# Altium PCB Sampler_DIOT.PCBDOC (part 9 of 9)
Units mm, origin at the board's own origin, x right, y up, seen from the top; angles counter-clockwise.
Board outline 222.17 x 100 mm, 4 copper layers (Top, GP1(GND), L3, Bot), stack 1.672 mm thick; 664 components, 411 nets, 2128 pads, 911 vias.
Unrouted connection lines stored in the file: 4.
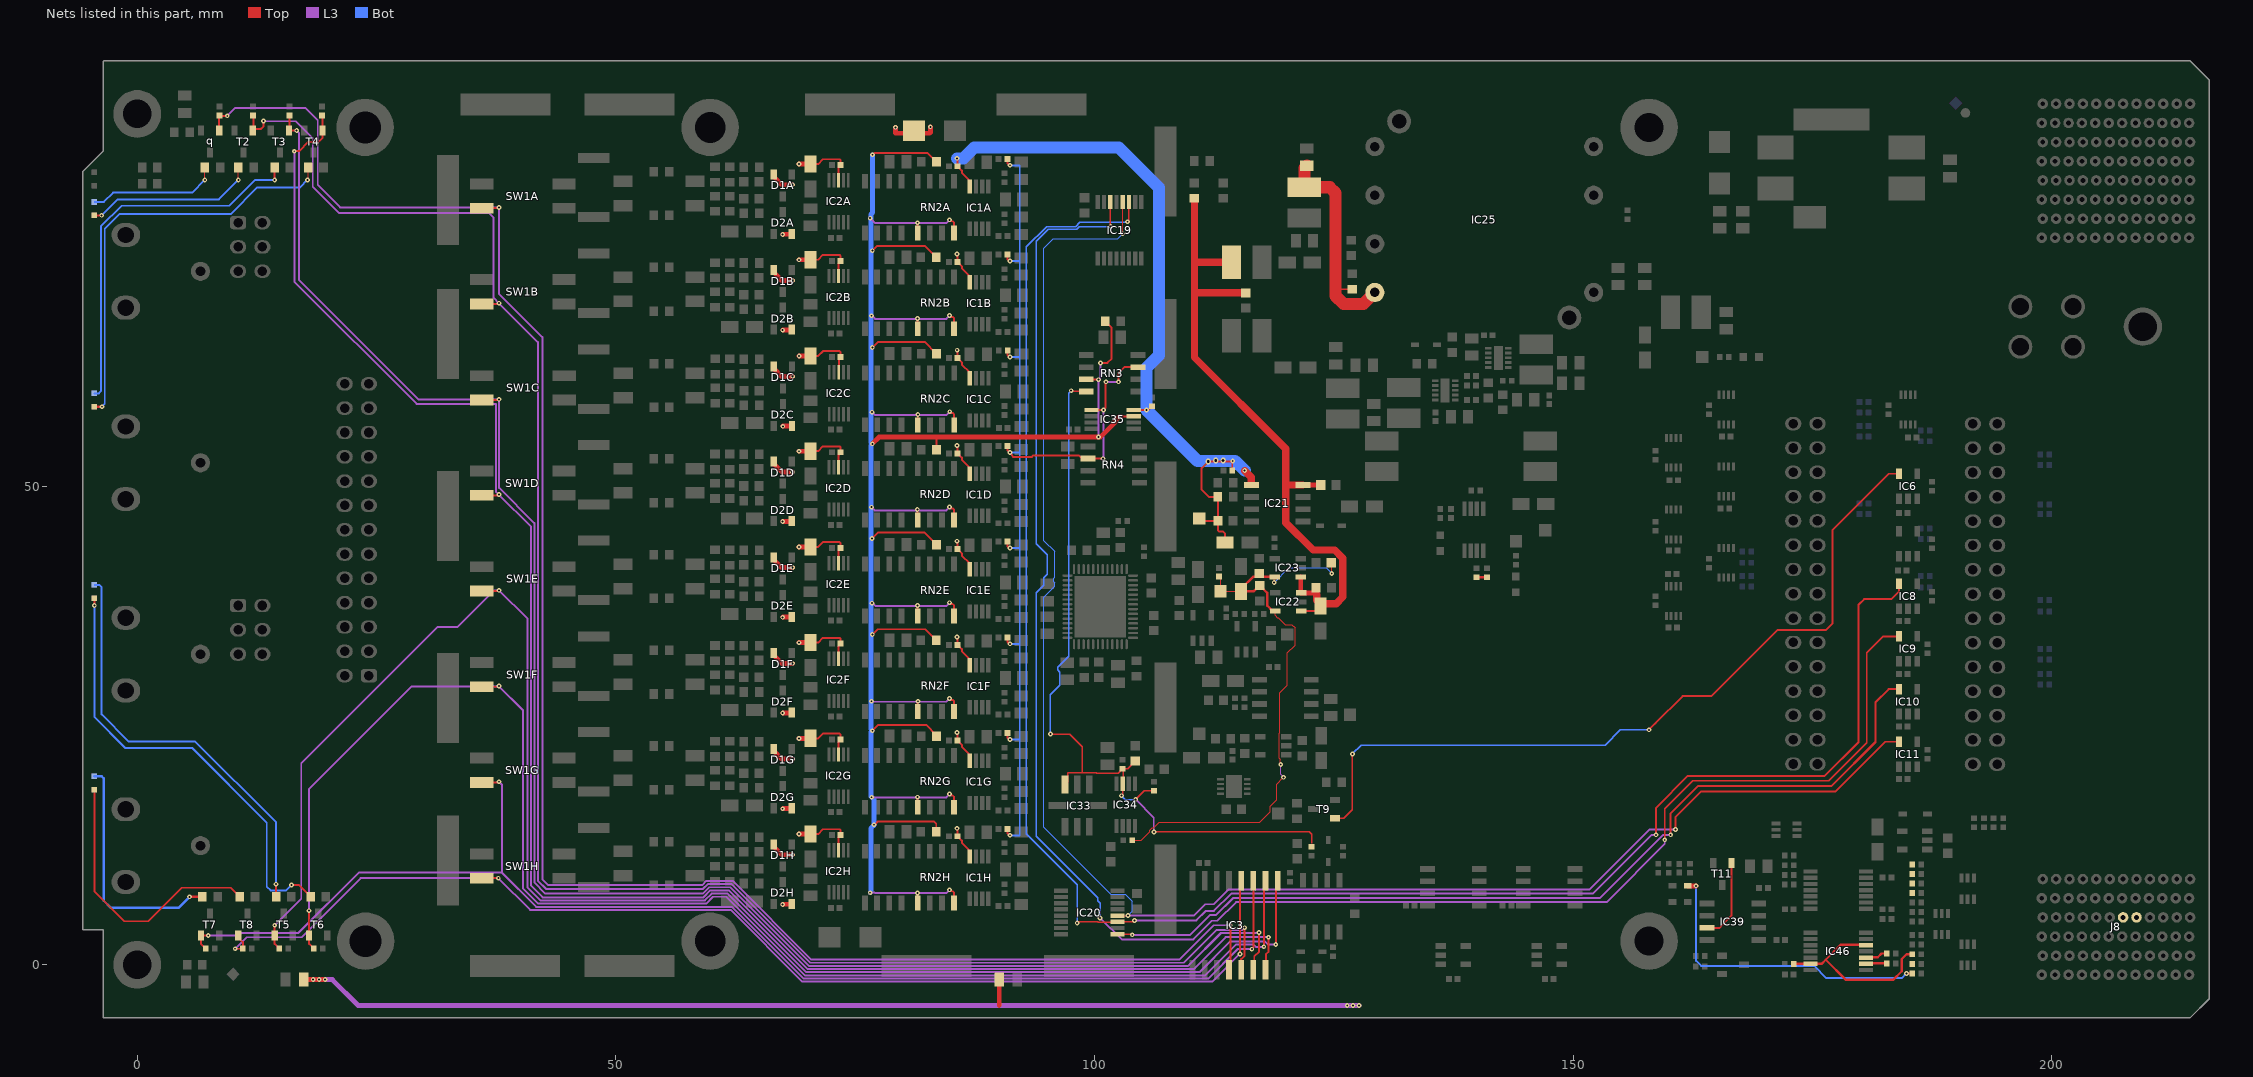
[diagram p9: the nets of this part, all layers, seen from the top]

## Via types
v1: diameter 0.5, hole 0.2, Top to Bot, tented both sides, 878 vias
v2: diameter 1, hole 0.6, Top to Bot, tented both sides, 18 vias
v3: diameter 0.6, hole 0.3, Top to Bot, tented both sides, 13 vias
v4: diameter 1.27, hole 0.711, Top to Bot, tented both sides, 2 vias

## Nets (pads, with @x,y where several pads share a name; then routed paths per layer and width w, separated by ;. In a path a pad name is that pad's centre, name@x,y a point inside that pad or via, vN(x,y) a via of type N, cw(c..) or ccw(c..) an arc to the next point about the centre after c; other vN are vias at no path point) (continued)
P12V0A: C8A.1 C8B.1 C8C.1 C8D.1 C8E.1 C8F.1 C8G.1 C8H.1 C9A.2 C9B.2 C9C.2 C9D.2 C9E.2 C9F.2 C9G.2 C9H.2 C13A.2 C13B.2 C13C.2 C13D.2 C13E.2 C13F.2 C13G.2 C13H.2 C38.1 C39.2 C40.2 C104.2 D1A.2 D1B.2 D1C.2 D1D.2 D1E.2 D1F.2 D1G.2 D1H.2 D2A.2 D2B.2 D2C.2 D2D.2 D2E.2 D2F.2 D2G.2 D2H.2 D5.1 IC1A.8 IC1B.8 IC1C.8 IC1D.8 IC1E.8 IC1F.8 IC1G.8 IC1H.8 IC2A.8 IC2B.8 IC2C.8 IC2D.8 IC2E.8 IC2F.8 IC2G.8 IC2H.8 IC21.1 IC35.8 R51.2 TP7.1 | length 193.7
  Top w0.203: C8H.1@70.329,13.658 71.129,13.658 71.632,14.161 73.364,14.161 73.475,14.05 C9H.2@73.475,13.55 73.275,13.35 IC2H.8@73.275,11.967 ; C8G.1@70.329,23.658 71.129,23.658 71.632,24.161 73.364,24.161 73.475,24.05 C9G.2@73.475,23.55 ; C8F.1@70.329,33.658 71.129,33.658 71.632,34.161 73.364,34.161 73.475,34.05 C9F.2@73.475,33.55 ; C8E.1@70.329,43.658 71.129,43.658 71.632,44.161 73.364,44.161 73.475,44.05 C9E.2@73.475,43.55 ; C8D.1@70.329,53.658 71.129,53.658 71.632,54.161 73.364,54.161 73.475,54.05 C9D.2@73.475,53.55 ; C8B.1@70.329,73.658 71.129,73.658 71.632,74.161 73.364,74.161 73.475,74.05 C9B.2@73.475,73.55 ; C8A.1@70.329,83.658 71.129,83.658 71.632,84.161 73.364,84.161 73.475,84.05 C9A.2@73.475,83.55 ; C8C.1@70.341,63.614 71.141,63.614 71.639,64.111 ; 71.632,64.111 71.639,64.111 ; 71.645,64.117 71.639,64.111 ; IC2G.8@73.275,21.967 73.275,23.258 C9G.2@73.465,23.448 ; IC2F.8@73.275,31.967 73.275,33.258 C9F.2@73.465,33.448 ; IC2E.8@73.275,41.967 73.275,43.258 C9E.2@73.465,43.448 ; IC2D.8@73.275,51.967 73.275,53.258 C9D.2@73.465,53.448 ; IC2B.8@73.275,71.967 73.275,73.258 C9B.2@73.465,73.448 ; IC2A.8@73.275,81.967 73.275,83.258 C9A.2@73.465,83.448 ; IC2C.8@73.288,61.923 73.288,63.214 C9C.2@73.478,63.404 ; C9C.2@73.475,63.5 73.475,64 73.364,64.111 71.639,64.111 ; v1(85.644,14.255) 85.694,14.205 C13H.2@85.694,13.43 86.144,12.98 86.144,12.755 86.969,11.93 IC1H.8@86.969,11.309 ; v1(85.644,24.255) 85.694,24.205 C13G.2@85.694,23.43 86.144,22.98 86.144,22.755 86.969,21.93 IC1G.8@86.969,21.309 ; v1(85.644,34.255) 85.694,34.205 C13F.2@85.694,33.43 86.144,32.98 86.144,32.755 86.969,31.93 IC1F.8@86.969,31.309 ; v1(85.644,44.255) 85.694,44.205 C13E.2@85.694,43.43 86.144,42.98 86.144,42.755 86.969,41.93 IC1E.8@86.969,41.309 ; v1(85.644,54.255) 85.694,54.205 C13D.2@85.694,53.43 86.144,52.98 86.144,52.755 86.969,51.93 IC1D.8@86.969,51.309 ; v1(85.644,74.255) 85.694,74.205 C13B.2@85.694,73.43 86.144,72.98 86.144,72.755 86.969,71.93 IC1B.8@86.969,71.309 ; v1(85.644,84.255) 85.694,84.205 C13A.2@85.694,83.43 86.144,82.98 86.144,82.755 86.969,81.93 IC1A.8@86.969,81.309 ; v1(85.657,64.211) 85.707,64.161 C13C.2@85.707,63.386 86.157,62.936 86.157,62.711 86.982,61.886 IC1C.8@86.982,61.265 ; IC35.8@104.094,57.955 v1(105.444,57.955) 105.619,57.955 C104.2@106.019,58.355 ; TP7.1@110.944,46.63 111.194,46.38 C40.2@112.894,46.38 ; C38.1@113.644,44.13 113.644,45.03 113.394,45.28 112.994,45.28 112.894,45.38 C40.2@112.894,46.38 ; C39.2@114.394,51.63 114.394,52.58 v3(111.894,52.58) 111.194,51.88 111.194,49.63 111.944,48.88 R51.2@112.894,48.88 C40.2@112.894,46.38
  Top w0.508: D1H.2@66.483,12.568 66.483,12.338 67.327,11.494 v1(68.457,11.494) ; D1G.2@66.483,22.568 66.483,22.338 67.327,21.494 v1(68.457,21.494) ; D1F.2@66.483,32.568 66.483,32.338 67.327,31.494 v1(68.457,31.494) ; D1E.2@66.483,42.568 66.483,42.338 67.327,41.494 v1(68.457,41.494) ; D1D.2@66.483,52.568 66.483,52.338 67.327,51.494 v1(68.457,51.494) ; D1B.2@66.483,72.568 66.483,72.338 67.327,71.494 v1(68.457,71.494) ; D1A.2@66.483,82.568 66.483,82.338 67.327,81.494 v1(68.457,81.494) ; D1C.2@66.496,62.524 66.496,62.294 67.339,61.45 v1(68.47,61.45) ; v1(67.428,6.304) 67.446,6.322 D2H.2@68.338,6.322 ; v1(67.428,16.304) 67.446,16.322 D2G.2@68.338,16.322 ; v1(67.428,26.304) 67.446,26.322 D2F.2@68.338,26.322 ; v1(67.428,36.304) 67.446,36.322 D2E.2@68.338,36.322 ; v1(67.428,46.304) 67.446,46.322 D2D.2@68.338,46.322 ; v1(67.428,66.304) 67.446,66.322 D2B.2@68.338,66.322 ; v1(67.428,76.304) 67.446,76.322 D2A.2@68.338,76.322 ; v1(67.44,56.26) 67.459,56.278 D2C.2@68.35,56.278 ; v1(69.135,13.653) 69.14,13.658 C8H.1@70.329,13.658 ; v1(69.135,23.653) 69.14,23.658 C8G.1@70.329,23.658 ; v1(69.135,33.653) 69.14,33.658 C8F.1@70.329,33.658 ; v1(69.135,43.653) 69.14,43.658 C8E.1@70.329,43.658 ; v1(69.135,53.653) 69.14,53.658 C8D.1@70.329,53.658 ; v1(69.135,73.653) 69.14,73.658 C8B.1@70.329,73.658 ; v1(69.135,83.653) 69.14,83.658 C8A.1@70.329,83.658 ; v1(69.148,63.609) 69.152,63.614 C8C.1@70.341,63.614 ; v1(79.22,87.498) 79.22,86.88 82.776,86.88 82.852,86.956 v1(82.852,87.549)
  Top w0.762: v1(115.694,51.63) 116.393,50.931 IC21.1@116.393,50.25
  Bot w1.27: v1(85.644,84.255) 86.319,84.255 87.444,85.38 102.544,85.38 106.725,81.199 106.725,63.661 105.444,62.38 v1(105.444,57.955) 110.757,52.642 112.669,52.642 114.432,52.642 v1(114.444,52.63) 114.694,52.63 v1(115.694,51.63)
  other v3: 112.669,52.68 113.444,52.68
P13V0: C37.2 C43.2 C47.1 C51.2 IC21.8 IC22.1 IC22.3 IC23.1 L3.2 R41.2 | length 72.3
  Top w0.254: IC22.1@121.598,36.96 123.1,36.96 123.598,37.458 C47.1@123.598,37.476
  Top w0.508: IC23.1@121.548,40.514 121.548,38.881 121.569,38.86 IC22.3@121.59,38.86 ; IC22.3@121.598,38.86 123.051,38.86 ; IC21.8@121.798,50.13 C37.2@123.644,50.13 ; C43.2@123.144,39.371 123.051,39.279 123.051,38.86 ; 123.223,38.688 123.051,38.86
  Top w0.762: 110.444,71.171 R41.2@110.444,80.08 ; 110.448,71.171 110.448,70.2 110.448,68.884 110.448,63.452 119.998,53.902 119.998,46.177 122.849,43.326 125.092,43.326 125.944,42.474 125.944,38.421 125.248,37.726 123.84,37.726 C47.1@123.594,37.48 123.594,37.705 123.223,38.076 123.223,38.688 ; 110.494,70.2 C51.2@115.819,70.2 ; 110.558,73.4 L3.2@114.3,73.4 ; 119.998,50.13 IC21.8@121.789,50.13
P13V0S: C48.2 IC25.7 L2.1 R56.2 | length 23.3
  Top w0.203: 125.194,70.58 R56.2@126.944,70.58
  Top w1.27: C48.2@122.194,83.48 121.944,83.23 L2.1@121.944,81.23 124.594,81.23 125.194,80.63 125.194,70.58 125.194,69.88 126.022,69.052 128.101,69.052 IC25.7@129.294,70.245
PE_CLK_N: J8.F4
PE_CLK_P: J8.E4
PGIA-CS: IC11.5 IC19.12 IC20.12 | length 177.8
  Top w0.127: IC20.12@102.399,5.137 v1(103.501,5.137) ; v1(102.944,76.38) 102.954,76.39 IC19.12@102.954,79.697
  Top w0.203: v1(160.7,14.125) 160.7,15.425 163.4,18.125 177.426,18.125 182.601,23.3 IC11.5@184.05,23.3
  L3 w0.203: v1(103.501,5.137) 110.384,5.137 111.573,6.325 112.475,6.325 114.03,7.88 151.73,7.88 157.975,14.125 v1(160.7,14.125)
  Bot w0.127: v1(102.944,76.38) 102.444,75.88 95.694,75.88 94.694,74.88 94.694,57.692 94.697,57.689 94.697,56.671 94.694,56.668 94.694,44.319 95.829,43.184 95.829,40.486 95.731,40.387 95.731,40.005 95.829,39.907 95.829,39.56 94.694,38.425 94.694,14.38 101.694,7.38 103.219,7.38 103.969,6.63 103.969,5.605 v1(103.501,5.137)
PGIA-MISO: IC10.5 IC20.9 | length 96.1
  Top w0.152: IC20.9@102.399,3.187 103.887,3.187 v1(103.944,3.13)
  Top w0.203: v1(160.2,13.575) 160.2,15.825 163.075,18.7 177.025,18.7 181.6,23.275 181.6,27.425 182.975,28.8 IC10.5@184.05,28.8
  L3 w0.203: v1(103.944,3.13) 110.005,3.13 112.08,5.205 112.705,5.205 114.475,6.975 152.804,6.975 159.404,13.575 v1(160.2,13.575)
PGIA-MOSI: IC9.5 IC19.14 | length 190.6
  Top w0.152: IC19.14@101.654,79.697 101.654,77.17 v1(101.694,77.13)
  Top w0.203: v1(159.58,13.055) 159.58,16.28 162.525,19.225 176.726,19.225 180.688,23.187 180.688,32.588 182.4,34.3 IC9.5@184.05,34.3
  L3 w0.203: v1(100.585,4.88) 100.621,4.88 102.849,2.651 110.326,2.651 112.276,4.601 112.851,4.601 114.801,6.55 153.5,6.55 159.58,12.63 v1(159.58,13.055)
  Bot w0.152: v1(100.585,4.88) 100.585,6.439 100.336,6.688 100.336,6.988 93.919,13.405 93.919,38.88 94.694,39.655 94.694,40.446 95.054,40.807 95.054,42.863 93.919,43.998 93.919,56.989 93.922,56.992 93.922,57.368 93.919,57.371 93.919,75.605 95.165,76.851 98.14,76.851 98.419,77.13 v1(101.694,77.13)
PGIA-SCK: IC8.5 IC19.11 IC20.11 | length 197.7
  Top w0.152: v1(98.194,4.38) 98.301,4.487 100.337,4.487 100.397,4.427 102.339,4.427 IC20.11@102.399,4.487 104.051,4.487 v1(104.194,4.63) ; v1(103.444,77.63) 103.604,77.79 IC19.11@103.604,79.697
  Top w0.203: v1(158.67,13.575) 158.67,16.395 162,19.725 176.299,19.725 179.825,23.251 179.825,37.606 180.419,38.2 183.268,38.2 184.05,38.982 IC8.5@184.05,39.8
  L3 w0.203: v1(104.194,4.63) 110.658,4.63 111.653,5.625 112.475,5.625 114.29,7.44 152.065,7.44 158.2,13.575 v1(158.67,13.575)
  Bot w0.152: v1(98.194,4.38) 98.194,8.38 92.891,13.683 92.891,75.006 95.015,77.13 98.024,77.13 98.477,77.583 103.397,77.583 v1(103.444,77.63)
PSU_EN: R115.1 R116.2 | length 1.1
  Top w0.254: R116.2@139.93,40.48 R115.1@141.03,40.48
REF_P1V7066: IC35.7 R7A.1 R7B.1 R7C.1 R7D.1 R7E.1 R7F.1 R7G.1 R7H.1 R83.2 RN2A.5 RN2A.8 RN2B.5 RN2B.8 RN2C.5 RN2C.8 RN2D.5 RN2D.8 RN2E.5 RN2E.8 RN2F.5 RN2F.8 RN2G.5 RN2G.8 RN2H.5 RN2H.8 RN3.7 | length 263.8
  Top w0.203: v1(76.744,44.53) 77.369,45.155 82.269,45.155 83.494,43.93 R7E.1@83.494,43.88 ; v1(76.79,24.455) 77.39,25.055 82.444,25.055 83.494,24.005 R7G.1@83.494,23.88 ; v1(76.79,34.505) 77.34,35.055 82.319,35.055 R7F.1@83.469,33.905 ; v1(76.79,64.48) 77.39,65.08 82.269,65.08 R7C.1@83.494,63.855 ; v1(76.79,74.605) 77.29,75.105 82.269,75.105 R7B.1@83.469,73.905 ; v1(76.819,84.63) 77.023,84.834 82.54,84.834 R7A.1@83.494,83.88 ; v1(76.973,14.631) 77.02,14.631 77.344,14.955 83.244,14.955 83.469,14.73 R7H.1@83.469,13.88 ; v1(81.494,47.555) 81.524,47.525 RN2D.5@81.524,46.455 ; v1(81.519,37.53) 81.524,37.525 RN2E.5@81.524,36.455 ; v1(81.519,67.53) 81.524,67.525 RN2B.5@81.524,66.455 ; v1(81.519,77.53) 81.524,77.525 RN2A.5@81.524,76.455 ; RN2H.5@81.524,6.455 v1(81.524,7.5) ; RN2G.5@81.524,16.455 v1(81.524,17.51) ; RN2F.5@81.524,26.455 81.524,27.485 v1(81.569,27.53) ; RN2C.5@81.537,56.412 81.537,57.498 v1(81.544,57.505) ; R7D.1@83.494,53.805 83.494,55.054 83.569,55.129 ; v1(84.869,7.83) 85.019,7.68 85.194,7.68 85.334,7.54 RN2H.8@85.334,6.455 ; v1(84.869,17.83) 85.019,17.68 85.194,17.68 85.334,17.54 RN2G.8@85.334,16.455 ; v1(84.869,27.83) 85.019,27.68 85.194,27.68 85.334,27.54 RN2F.8@85.334,26.455 ; v1(84.869,37.83) 85.019,37.68 85.194,37.68 85.334,37.54 RN2E.8@85.334,36.455 ; v1(84.869,47.83) 85.019,47.68 85.194,47.68 85.334,47.54 RN2D.8@85.334,46.455 ; v1(84.869,67.83) 85.019,67.68 85.194,67.68 85.334,67.54 RN2B.8@85.334,66.455 ; v1(84.869,77.83) 85.019,77.68 85.194,77.68 85.334,77.54 RN2A.8@85.334,76.455 ; v1(84.882,57.786) 85.032,57.636 85.207,57.636 85.347,57.496 RN2C.8@85.347,56.412 ; RN3.7@99.144,61.17 100.379,61.17 v1(100.419,61.13) ; v1(100.619,62.88) 101.344,62.88 101.794,63.33 101.794,66.58 R83.2@101.144,67.23 ; 102.842,57.305 IC35.7@104.094,57.305
  Top w0.508: v1(76.79,54.43) 77.489,55.129 83.569,55.129 100.618,55.129 102.138,56.649 102.138,56.816 102.627,57.305 102.842,57.305
  L3 w0.203: v1(76.569,7.53) 77.044,7.53 77.094,7.48 84.519,7.48 v1(84.869,7.83) ; v1(76.569,78.005) 77.094,77.48 84.519,77.48 v1(84.869,77.83) ; v1(76.694,27.53) 76.744,27.48 84.519,27.48 v1(84.869,27.83) ; v1(76.698,47.808) 77.025,47.48 84.519,47.48 v1(84.869,47.83) ; v1(76.723,17.506) 76.749,17.48 84.519,17.48 v1(84.869,17.83) ; v1@76.732,67.842 77.094,67.48 84.519,67.48 v1(84.869,67.83) ; v1@76.779,57.764 77.107,57.436 84.532,57.436 v1(84.882,57.786) ; v1@76.793,37.827 77.14,37.48 84.519,37.48 v1(84.869,37.83) ; v1(100.419,55.13) v1(100.419,61.13) 100.619,61.33 v1(100.619,62.88)
  Bot w0.508: v1(76.569,7.53) 76.638,7.599 76.638,14.266 76.973,14.601 v1(76.973,14.631) 76.973,17.256 v1(76.723,17.506) 76.638,17.591 76.638,24.303 v1(76.79,24.455) 76.638,24.607 76.638,44.53 76.638,54.278 v1(76.79,54.43) 76.638,54.582 76.638,64.48 76.638,78.416 76.819,78.597 v1(76.819,84.63)
  other v1: 76.748,37.782 76.748,57.733 76.698,67.809
REF_P2V048: IC35.1 R13A.1 R13B.1 R13C.1 R13D.1 R13E.1 R13F.1 R13G.1 R13H.1 RN3.3 RN4.6 | length 108.4
  Top w0.203: R13H.1@90.914,14.205 90.914,13.735 91.144,13.505 v1(91.169,13.53) ; R13G.1@90.914,24.205 90.914,23.735 91.144,23.505 v1(91.169,23.53) ; R13F.1@90.914,34.205 90.914,33.735 91.144,33.505 v1(91.169,33.53) ; R13E.1@90.914,44.205 90.914,43.735 91.144,43.505 v1(91.169,43.53) ; R13D.1@90.914,54.205 90.914,53.735 91.4,53.249 91.4,53.187 91.534,53.053 93.442,53.053 93.619,53.23 98.369,53.23 98.709,52.89 RN4.6@99.319,52.89 100.884,52.89 v1(100.894,52.88) ; R13B.1@90.914,74.205 90.914,73.735 91.144,73.505 v1(91.169,73.53) ; R13A.1@90.914,84.205 90.914,83.735 91.144,83.505 v1(91.169,83.53) ; R13C.1@90.927,64.161 90.927,63.691 91.157,63.461 v1(91.182,63.486) ; IC35.1@99.694,57.955 v1(100.944,57.955) 101.144,58.155 101.144,60.855 v1(101.194,60.905) ; v1(102.519,60.905) 102.519,61.83 103.129,62.44 RN3.3@104.544,62.44
  L3 w0.203: v1(100.894,52.88) 100.944,52.93 v1(100.944,57.955) ; v1(101.194,60.905) v1(102.519,60.905)
  Bot w0.203: v1@91.233,13.526 92.194,13.526 92.194,23.526 ; v1@91.233,23.526 92.194,23.526 ; v1@91.233,33.526 92.194,33.526 ; v1@91.233,43.526 92.194,43.526 ; v1@91.233,53.526 92.194,53.526 ; v1@91.233,73.526 92.194,73.526 ; v1@91.233,83.526 92.194,83.526 92.194,73.526 ; v1@91.246,63.482 92.194,63.482 ; 92.194,23.526 92.194,33.526 ; 92.194,33.526 92.194,43.526 ; 92.194,43.526 92.194,53.526 ; 92.194,53.526 92.194,63.482 ; 92.194,63.482 92.194,73.526
  other v1: 91.169,53.53
REF_P4V096: C100.2 IC33.7 IC34.7 R59.1 R81.1 R82.2 RN3.8 | length 82.7
  Top w0.152: v1(95.394,24.105) 97.427,24.105 98.73,22.802 98.73,20.076 ; IC33.7@96.924,18.834 97.198,19.108 97.198,19.987 97.287,20.076 98.73,20.076 ; v1(97.569,59.98) 97.649,59.9 RN3.8@99.144,59.9 ; v1(102.814,17.67) 102.944,17.8 IC34.7@102.944,18.905 102.982,18.943 102.982,20.435 R81.1@102.948,20.468 ; C100.2@104.269,21.28 104.244,21.28 103.845,20.881 103.845,20.856 103.457,20.468 R81.1@102.948,20.468 ; v1(104.306,17.286) 105.206,18.185 R82.2@106.219,18.185 ; v1(106.219,13.88) 122.444,13.88 122.694,13.63 122.694,12.68 ; 98.73,20.076 100.173,20.076 100.221,20.028 102.488,20.028 102.928,20.468 R81.1@102.948,20.468
  L3 w0.152: v1(104.306,17.286) 106.219,15.372 v1(106.219,13.88)
  Bot w0.152: v1(95.394,24.105) 95.394,28.196 96.397,29.199 96.397,30.568 96.155,30.809 96.155,31.066 97.324,32.235 97.324,59.735 v1(97.569,59.98) ; v1(102.814,17.67) 103.226,17.258 104.278,17.258 v1(104.306,17.286)
REF_VCC: C41.2 C42.2 C44.1 C45.2 IC22.5 IC23.5 R54.2 R80.1 TP8.1 | length 62.1
  Top w0.127: R80.1@103.952,13.013 104.902,13.013 105.779,13.889 105.779,14.062 106.037,14.32 106.21,14.32 106.766,14.877 117.292,14.877 118.381,15.966 118.381,16.586 119.026,17.231 119.026,18.87 v1(119.742,19.586) ; C45.2@113.021,40.565 113.174,40.412 TP8.1@113.174,39.023 C44.1@115.325,39.023 ; v1(118.778,39.937) 118.778,40.307 IC23.5@118.917,40.446 ; IC22.5@118.894,36.965 118.894,36.499 119.123,36.27 119.215,36.27 119.958,35.527 120.597,35.527 120.744,35.381 120.815,35.381 120.961,35.234 120.961,33.406 120.136,32.58 120.136,29.208 119.369,28.44 119.369,24.249 119.304,24.184 119.304,21.576 119.394,21.486 119.394,20.99 v1(119.462,20.923) ; C42.2@124.74,41.985 124.794,41.93 v1(124.794,40.886)
  Top w0.254: IC23.5@118.844,40.519 117.628,40.519 117.267,40.88 R54.2@117.217,40.88 116.894,40.557 116.599,40.557 115.325,39.282 115.325,39.023 C44.1@115.325,39.007 116.634,39.007 117.242,39.616 117.292,39.616 118.056,38.852 118.056,37.528 118.619,36.965 IC22.5@118.894,36.965
  L3 w0.127: v1(119.462,20.923) 119.462,19.929 119.742,19.649 v1(119.742,19.586)
  Bot w0.127: v1(118.778,39.937) 120.296,41.456 124.199,41.456 124.768,40.886 v1(124.794,40.886)
RST: IC39.3 T11.1 | length 8.6
  Top w0.203: IC39.3@164,3.865 165.306,3.865 166.55,5.109 T11.1@166.55,10.65
RSTn: D14.1 R93.1 | length 32.2
  Top w0.203: v1(184.825,-0.9) R93.1@185.43,-0.9
  Top w0.508: D14.1@162,8.25 v1(162.85,8.25)
  Bot w0.203: v1(162.85,8.25) 162.85,0.415 163.388,-0.123 170.402,-0.123 175.186,-0.123 176.463,-1.4 184.325,-1.4 v1(184.825,-0.9)
SDR_MODE: IC6.5 T9.1 | length 83
  Top w0.152: T9.1@125.129,15.317 126.067,15.317 126.95,16.2 v1(126.95,22.027)
  Top w0.203: v1(157.925,24.55) 158.596,25.221 161.45,28.075 164.45,28.075 171.35,34.975 176.425,34.975 177.125,35.675 177.125,45.45 182.975,51.3 IC6.5@184.05,51.3
  Bot w0.152: v1(126.95,22.027) 127.873,22.95 153.35,22.95 154.95,24.55 v1(157.925,24.55)
SERVMOD_3V3: IC46.5 IC46.13 R98.1 R101.2 | length 20.3
  Top w0.254: R101.2@172.9,0.15 173.1,0.15 173.15,0.1 IC46.13@174.8,0.1 175.97,0.1 176.398,0.527 ; IC46.5@180.631,2.092 177.963,2.092 176.398,0.527 ; R98.1@185.43,1.1 184.853,1.1 184.35,0.597 184.35,-0.675 183.475,-1.55 178.475,-1.55 176.398,0.527
SHARED_BUS_0: R95.1
SHARED_BUS_1: R92.1
SHARED_BUS_2: R48.1
SHARED_BUS_3: R96.1
SHARED_BUS_4: R97.1
STRIP1: R49.2 | length 112.6
  Top w0.508: R49.2@17.38,-1.55 v1(18.375,-1.55) ; v1(18.375,-1.55) v1(19,-1.55) 19.375,-1.55 v1(19.625,-1.55)
  L3 w0.508: v1(18.375,-1.55) v1(19,-1.55) v1(19.625,-1.55) 20.375,-1.55 23.075,-4.25 v1(126.413,-4.25) v1(127.025,-4.25) v1(127.637,-4.25)
STRIP2: R50.2 | length 2.7
  Top w0.508: 90.05,-4.25 R50.2@90.05,-1.55
Switch_I2C.SCL: IC46.2 R121.2 | length 2.2
  Top w0.254: IC46.2@180.631,0.142 180.632,0.141 R121.2@182.793,0.141
Switch_I2C.SDA: IC46.3 R120.2 | length 3.6
  Top w0.203: IC46.3@180.631,0.792 181.871,0.792
  Top w0.254: IC46.3@180.631,0.792 181.841,0.792 182.231,1.182 R120.2@182.793,1.182
TERM_STAT0: IC3.4 q.1 R25.2 SW1A.2 | length 195.2
  Top w0.203: q.1@8.55,87.15 8.55,88.68 R25.2@8.6,88.73 8.63,88.7 v1(9.4,88.7) ; SW1A.2@35.986,79.05 37.716,79.05 v1(37.786,79.12) ; IC3.4@114.059,-0.52 114.194,-0.385 v1(114.194,4.13)
  L3 w0.203: v1(9.4,88.7) 10.2,89.5 17.6,89.5 18.85,88.25 18.85,81.474 21.194,79.13 37.776,79.13 v1(37.786,79.12) 37.786,70.113 42.319,65.58 42.319,8.956 42.949,8.326 59.029,8.326 59.462,8.76 62.217,8.76 70.433,0.544 108.858,0.544 112.444,4.13 v1(114.194,4.13)
TERM_STAT1: IC3.5 R27.2 SW1B.2 T2.1 | length 191.2
  Top w0.203: R27.2@12.194,88.68 12.144,88.63 12.144,87.3 12.869,87.3 13.194,87.625 v1(13.194,88.15) ; SW1B.2@35.986,69.05 37.716,69.05 v1(37.786,69.12) ; IC3.5@115.329,-0.52 115.329,0.588 115.694,0.953 v1(115.694,3.88)
  L3 w0.203: v1@13.194,88.13 16.55,88.13 18.33,86.35 18.33,81.277 21.057,78.55 36.699,78.55 37.225,78.024 37.225,69.681 v1(37.786,69.12) 41.844,65.062 41.844,8.781 42.707,7.918 59.087,7.918 59.599,8.429 62.08,8.429 70.296,0.214 109.314,0.214 112.751,3.651 115.465,3.651 v1(115.694,3.88)
TERM_STAT2: IC3.6 R29.2 SW1C.2 T3.1 | length 183.5
  Top w0.203: R29.2@15.944,88.68 15.894,88.63 15.894,87.1 15.944,87.15 v1(16.65,87.15) ; SW1C.2@35.999,59.006 37.729,59.006 v1(37.799,59.076) ; IC3.6@116.599,-0.52 116.694,-0.425 116.694,0.88 117.194,1.38 v1(117.194,3.38)
  L3 w0.203: v1(16.65,87.15) 16.9,86.9 16.9,71.533 29.357,59.076 v1(37.799,59.076) 37.799,49.825 41.474,46.15 41.474,8.6 42.639,7.436 59.072,7.436 59.735,8.099 61.944,8.099 70.159,-0.116 109.784,-0.116 113.221,3.321 117.135,3.321 v1(117.194,3.38)
TERM_STAT3: IC3.7 R31.2 SW1D.2 T4.1 | length 185.9
  Top w0.203: v1(16.4,85) 16.894,85 17.869,85.975 18.944,85.975 19.33,86.361 R31.2@19.33,88.8 ; SW1D.2@35.986,49.05 37.716,49.05 v1(37.786,49.12) ; IC3.7@117.869,-0.52 117.944,-0.445 117.944,1.13 118.194,1.38 v1(118.194,2.88)
  L3 w0.203: v1(16.4,85) 16.4,71.374 29.177,58.597 37.468,58.597 37.468,49.437 37.716,49.19 37.716,49.05 v1(37.786,49.12) 41.144,45.762 41.144,8.255 42.348,7.051 59.154,7.051 59.872,7.769 61.807,7.769 70.022,-0.446 110.368,-0.446 113.694,2.88 v1(118.194,2.88)
TERM_STAT4: IC3.9 R33.2 SW1E.2 T5.1 | length 173.6
  Top w0.203: v1(14.35,4.13) T5.1@14.35,3.05 14.35,2.18 R33.2@14.83,1.7 ; SW1E.2@35.986,39.05 37.716,39.05 v1(37.786,39.12) ; v1(118.944,2.13) 118.944,8.585 IC3.9@119.139,8.78
  L3 w0.203: v1(14.35,4.13) 17.125,6.905 17.125,21.061 31.369,35.305 33.469,35.305 37.284,39.12 v1(37.786,39.12) 40.769,36.137 40.769,26.604 40.774,26.599 40.774,16.325 40.769,16.32 40.769,8.056 42.104,6.721 59.291,6.721 60.009,7.439 61.67,7.439 69.885,-0.777 110.973,-0.777 114.189,2.439 117.812,2.439 118.121,2.13 v1(118.944,2.13)
TERM_STAT5: IC3.10 R36.2 SW1F.2 T6.1 | length 155.4
  Top w0.203: T6.1@17.95,3.05 17.95,2.18 R36.2@18.43,1.7 ; v1(17.95,5.65) 17.95,3.15 18,3.1 T6.1@18,3.05 ; SW1F.2@35.986,29.05 37.716,29.05 v1(37.786,29.12) ; v1(117.694,1.88) 117.694,8.605 IC3.10@117.869,8.78
  L3 w0.203: v1(17.95,5.65) 17.95,18.386 28.634,29.07 37.736,29.07 v1(37.786,29.12) 40.286,26.62 40.286,7.988 41.884,6.39 59.428,6.39 60.146,7.109 61.533,7.109 69.749,-1.107 111.568,-1.107 114.784,2.109 116.642,2.109 116.871,1.88 v1(117.694,1.88)
TERM_STAT6: IC3.11 R39.2 SW1G.2 T7.1 | length 138.6
  Top w0.203: R39.2@7.13,1.7 6.65,2.18 T7.1@6.65,3.05 v1(7.415,3.05) v1@7.42,3.05 ; SW1G.2@35.986,19.05 37.716,19.05 v1(37.786,19.12) ; v1(116.444,1.63) 116.599,1.785 IC3.11@116.599,8.78
  L3 w0.203: v1(7.415,3.05) 10.65,3.05 10.925,3.325 16.839,3.325 23.139,9.625 38.1,9.625 ; v1(37.786,19.12) 38.1,18.806 38.1,9.625 ; v1(116.444,1.63) 114.944,1.63 111.877,-1.437 69.612,-1.437 62.115,6.06 41.665,6.06 38.1,9.625
TERM_STAT7: IC3.12 R43.2 SW1H.2 T8.1 | length 125.5
  Top w0.203: v1(10.225,1.675) 11.005,1.675 R43.2@11.03,1.7 11.03,2.37 10.55,2.85 T8.1@10.55,3.05 ; SW1H.2@35.986,9.05 v1(37.716,9.05) ; v1(115.194,1.13) 115.194,8.645 IC3.12@115.329,8.78
  L3 w0.203: v1(10.225,1.675) 11.425,2.875 17.156,2.875 23.331,9.05 v1(37.716,9.05) 41.037,5.729 61.979,5.729 69.475,-1.767 112.297,-1.767 v1(115.194,1.13)
TS0: D3.1 R26.1 | length 13.8
  Top w0.127: v1(7.05,82) R26.1@7.05,83.3
  Bot w0.203: D3.1@-4.49,79.7 -3.5,79.7 -2.525,80.675 5.725,80.675 v1(7.05,82)
TS1: D4.1 R28.1 | length 17.9
  Top w0.127: v1(10.55,82) R28.1@10.55,83.3
  Top w0.203: D4.1@-4.49,78.3 v1(-3.72,78.301)
  Bot w0.203: v1(-3.72,78.301) -2.046,79.975 8.525,79.975 v1(10.55,82)
TS2: D19.1 R30.1 | length 39.5
  Top w0.203: v1(14.35,82) R30.1@14.35,83.3
  Bot w0.203: D19.1@-4.49,59.7 -4.025,59.7 -3.8,59.925 -3.8,77.15 -1.65,79.3 9.6,79.3 12.3,82 v1(14.35,82)
TS3: D20.1 R32.1 | length 44.1
  Top w0.127: v1(17.775,82) 17.85,82.075 R32.1@17.85,83.3
  Top w0.254: D20.1@-4.49,58.3 v1(-3.7,58.3)
  Bot w0.203: v1(-3.7,58.3) -3.4,58.6 -3.4,76.907 -1.882,78.425 9.75,78.425 12.55,81.225 17,81.225 v1(17.775,82)
TS4: D21.1 R34.1 | length 44.8
  Top w0.203: R34.1@14.5,7.1 v1(14.5,8.425)
  Bot w0.203: D21.1@-4.49,39.7 -4,39.7 -3.734,39.434 -3.734,26.159 -0.925,23.35 6.025,23.35 14.5,14.875 v1(14.5,8.425)
TS5: D23.1 R37.1 | length 47.2
  Top w0.203: v1(-4.49,37.55) D23.1@-4.49,38.3 ; v1(16.1,8.325) 16.125,8.35 16.85,8.35 R37.1@18.1,7.1
  Bot w0.203: v1(-4.49,37.55) -4.49,25.89 -1.25,22.65 5.725,22.65 13.525,14.85 13.525,8.156 13.919,7.762 15.538,7.762 v1(16.1,8.325)
TS6: D25.1 R40.1 | length 24.9
  Top w0.254: v1(5.462,7.1) R40.1@6.8,7.1
  Bot w0.254: D25.1@-4.49,19.7 -3.725,19.7 -3.5,19.475 -3.5,6.685 -2.79,5.975 4.337,5.975 v1(5.462,7.1)
TS7: D26.1 R44.1 | length 29
  Top w0.203: D26.1@-4.49,18.3 -4.49,7.675 -1.365,4.55 1.15,4.55 4.65,8.05 9.75,8.05 R44.1@10.7,7.1
pads on no net: D12.5 D13.5 D18.5 FTG1.FTG2 FTG2.1 FTG3.1 FTG4.1 IC3.13 IC12.5 IC18.5 IC25.9 IC28.4 IC31.4 IC41.4 IC43.7 IC44.7 J8.B1 J8.L2 J9.A3 J9.A5 J9.A7 J9.A8 J9.B2 J9.B3 J9.B4 J9.B5 J9.B6 J9.B7 J9.B8 J9.C2 J9.C4 J9.C6 J9.C8 J9.D3 J9.D5 J9.D7 J9.D8 J9.E2 J9.E3 J9.E4 J9.E5 J9.E6 J9.E7 J9.E8 J9.F2 J9.F4 J9.F6 J9.F8 J9.G3 J9.G5 J9.G7 J9.H2 J9.H3 J9.H4 J9.H5 J9.H6 J9.H7 J9.H8 J9.I2 J9.I4 J9.I6 J9.I8 J9.J3 J9.J5 J9.J7 J9.K2 J9.K3 J9.K4 J9.K5 J9.K6 J9.K7 J9.K8 J9.L2 J9.L4 J9.L6 J9.L8 J10.5 M1.MH M2.MH Standoff1.MH Standoff2.MH

## Polygon pours and split planes (outlines as drawn)
no net on Top "ML1_BAL" (solid, pour order 29): -4.68,-2.912 216.469,-2.912 216.469,94.18 -4.971,94.18
GND on Top "GND_L01_P034" (solid, remove dead copper, pour order 34): 198.431,47.15 198.431,41.225 216.206,41.225 216.206,47.15
NetC52_1 on Top "Top Overlay-No Net" (solid, remove dead copper, pour order 20): 156.225,64.3 154.2,62.275 151.8,62.275 151.8,64.463 151.8,71.68 161.2,71.68 161.2,64.3
P12V0A on Top "ML1_BAL" (solid, remove dead copper, pour order 28): 117.619,49.63 117.619,51.23 116.344,52.505 115.494,53.355 111.244,53.355 110.769,53.355 110.044,52.63 109.869,52.455 109.869,47.48 109.869,46.355 110.544,45.68 111.594,44.63 111.594,43.755 111.594,43.53 112.269,42.855 114.394,42.855 114.569,42.855 114.969,43.255 114.994,43.28 114.994,44.73 114.994,49.105 115.394,49.505 115.469,49.58 117.569,49.58
STRIP2 on Top "esd1" (solid, pour order 18): 96.998,-5.55 96.998,-3.281 41.998,-3.281 41.998,-5.55
CHASSIS1 on Top "esd1" (solid, pour order 2): -2.752,2.95 6,2.95 6,-3.3 36.998,-3.3 36.998,-5.55 -2.752,-5.55
N12V0A on Top "ML1_BAL" (solid, remove dead copper, pour order 26): 118.28,22.755 118.28,15.601 110.894,15.601 110.894,22.38 111.469,22.955 111.519,23.005 118.044,23.005
STRIP1 on Top "STRIP1_L01_P030" (solid, pour order 30): 214.469,-5.55 216.709,-3.31 116.998,-3.31 116.998,-5.55
no net on Bot "ML1_BAL" (solid, pour order 40): -4.924,94.18 216.469,94.18 216.469,-4.42 -4.629,-4.42
GND on Bot "GND_L04_P041" (solid, remove dead copper, pour order 41): 198.431,47.15 198.431,41.225 216.206,41.225 216.206,47.15
N12V0A on Bot "ML1_BAL" (solid, remove dead copper, pour order 4): 64.962,84.398 64.962,4.362 67.694,1.63 73.944,1.63 90.944,1.63 90.944,4.88 74.244,4.88 67.87,4.88 66.944,5.806 66.944,14.13 66.944,84.38 66.694,84.63 65.194,84.63
STRIP2 on Bot "esd1" (solid, pour order 24): 96.998,-5.55 96.998,-3.281 41.998,-3.281 41.998,-5.55
STRIP1 on Bot "STRIP1_L04_P027" (solid, pour order 27): 214.469,-5.55 216.709,-3.31 116.998,-3.31 116.998,-5.55
P12V0A on Bot "ML1_BAL" (solid, remove dead copper, pour order 31): 68.944,5.13 67.944,5.13 67.444,5.63 67.194,5.88 67.194,7.206 67.194,84.88 67.944,85.63 70.944,88.63 82.444,88.63 86.544,88.63 87.694,87.48 87.694,84.63 87.694,11.13 87.194,10.63 86.694,10.63 86.303,10.63 84.194,12.739 84.194,83.88 83.944,84.13 83.694,84.38 76.694,84.38 75.194,84.38 74.694,83.88 74.422,83.608 70.944,83.608 70.922,83.608 70.444,83.13 70.444,6.63 68.944,5.13 68.194,5.13
N12V0A on Bot "ML1_BAL" (solid, remove dead copper, pour order 32): 89.444,77.38 89.809,77.38 90.944,76.245 90.944,4.88 89.944,3.88 88.944,3.88 88.444,4.38 88.269,4.555 88.269,8.088 88.269,77.205 88.444,77.38
CHASSIS1 on Bot "esd1" (solid, pour order 10): -2.752,0.94 4.373,0.94 4.373,-3 36.998,-3 36.998,-5.55 -2.752,-5.55
GND on L3 (solid, remove dead copper, pour order 42): -4.828,94.45 216.122,94.45 216.122,-2.994 100.369,-2.994 100.369,-3.025 -4.457,-3.025
P12V0_DIOT on L3 "P12V0_DIOT_L03_P035" (solid, pour order 35): 216.21,14.616 216.21,-2.994 183.359,-2.994 183.359,14.616
GND on GP1(GND) (split plane): 40.658,-3.14 40.686,-3.159 40.699,-3.168 40.748,-3.177 118.371,-3.177 118.371,-5.04 36.625,-5.04 36.625,-0.927 38.445,-0.927
GND on GP1(GND) (split plane): 215.959,92.239 215.959,-3.339 214.258,-5.04 118.625,-5.04 118.625,-3.05 118.616,-3.001 118.588,-2.96 118.547,-2.932 118.498,-2.923 40.801,-2.923 38.588,-0.71 38.547,-0.682 38.498,-0.673 36.498,-0.673 36.449,-0.682 36.408,-0.71 36.38,-0.751 36.371,-0.8 36.371,-5.04 -3.06,-5.04 -3.06,3.65 -3.069,3.75 -3.098,3.845 -3.146,3.934 -3.209,4.011 -3.286,4.074 -3.375,4.122 -3.47,4.151 -3.57,4.16 -5.19,4.16 -5.19,82.684 -3.209,84.664 -3.146,84.742 -3.098,84.83 -3.069,84.926 -3.06,85.025 -3.06,93.94 115.308,93.94 115.308,62.692 125.479,52.521 151.336,52.521 162.405,63.589 162.405,66.15 161.205,66.15 161.205,63.639 151.286,53.721 126.029,53.721 116.508,63.242 116.508,93.94 214.258,93.94

## Keep-outs
KeepOutLayer:
  drawing of 7794 lines, arcs and shapes, not listed

## Other copper
Top:
  region net CHASSIS2: 4.104,87.002 4.104,89.405 3.601,89.405 3.601,87.002
  rectangle net CHASSIS2: 1.78,89.02 4.894,89.523
  rectangle net ADC_IN_P4: 43.569,42.68 51.769,45.605
  rectangle net ADC_IN_P5: 43.569,32.68 51.769,35.605
  rectangle net ADC_IN_P3: 43.569,52.68 51.769,55.605
  rectangle net ADC_IN_P2: 43.582,62.636 51.782,65.561
  rectangle net NetC52_1: 140.191,63.97 140.475,64.486
  rectangle net GND: 143.916,58.068 144.366,58.558
  rectangle net ADC_IN_P1: 43.569,72.72 51.769,75.645
  rectangle net ADC_IN_P0: 43.569,82.68 51.769,85.605
  rectangle net GND: 86.519,86.63 86.919,87.105
  rectangle net P6V0: 135.141,58.87 135.277,59.163
  rectangle net GND: 127.069,61.655 127.53,62.08
  rectangle net P6V0: 135.166,59.87 135.316,60.17
  rectangle net NetIC36_43: 101.919,46.13 102.269,46.63
  rectangle net GND: 100.694,45.53 101.119,45.921
  rectangle net GND: 113.894,22.33 114.444,22.63
  rectangle net P5V0A: 105.269,29.78 106.019,31.155
  rectangle net GND: 124.469,38.656 124.919,39.28
  rectangle net ADC_IN_P7: 43.569,12.68 51.769,15.605
  rectangle net ADC_IN_P6: 43.569,22.68 51.769,25.605
  pour cut-out: 151.332,52.532 162.4,63.6 162.4,94.453 161.2,94.453 161.2,63.65 151.282,53.732 126.024,53.732 116.503,63.253 116.503,96.028 115.303,96.028 115.303,62.703 125.474,52.532
  pour cut-out: 36.998,-3.3 36.998,-5.55 41.998,-5.55 41.998,-3.3
  pour cut-out: 96.998,-3.281 96.998,-5.599 116.998,-5.599 116.998,-3.281
L3:
  rectangle net P5V0A: 105.094,29.955 105.844,31.055
  rectangle net GND: 98.013,34.33 103.094,40.619
  pour cut-out: 151.336,52.521 162.405,63.589 162.405,94.442 161.205,94.442 161.205,63.639 151.286,53.721 126.029,53.721 116.508,63.242 116.508,96.017 115.308,96.017 115.308,62.692 125.479,52.521
Bot:
  rectangle net N13V0: 113.644,17.545 115.535,19.799
  rectangle net N13V0: 115.302,18.655 115.535,19.799
  pour cut-out: 151.333,52.518 162.402,63.586 162.402,94.439 161.202,94.439 161.202,63.636 151.283,53.718 126.026,53.718 116.505,63.239 116.505,96.014 115.305,96.014 115.305,62.689 125.476,52.518
  pour cut-out: 96.998,-3.281 96.998,-5.599 116.998,-5.599 116.998,-3.281
  pour cut-out: 36.998,-3.232 36.998,-5.55 41.998,-5.55 41.998,-3.232
GP1(GND) (plane layer: these items are gaps in the copper):
  pour cut-out: 151.336,52.521 162.405,63.589 162.405,66.15 161.205,66.15 161.205,63.639 151.286,53.721 126.029,53.721 116.508,63.242 116.508,96.017 115.308,96.017 115.308,62.692 125.479,52.521
  lines w0.25: 36.498,-5.3 36.498,-0.8 38.498,-0.8 40.748,-3.05 118.498,-3.05 118.498,-5.3
  lines w0.5: 198.438,18.698 198.713,18.973 198.713,18.473

## Silkscreen, mask and mechanical layers (free items; w line width, h text height)
TopOverlay:
  drawing of 266 lines, arcs and shapes, not listed
  text "Sampler v3.0" at 111.175,91.45 h2.03
  text "WUT ISE 2024" at 117.425,89 h1.02
  text "Termination" at 45.9,85.7 h1.02
  text "off" at 35.632,84.925 h1.02
  text "CH0" at 38.925,84.925 h1.02
  text "on" at 42.957,84.925 h1.02
  text "EEM" at -3.566,81.7 h0.8
  text "TS1" at -3.566,78.6 h0.8
  text "ADC1" at 3.934,76.1 h0.8
  text "Termination" at 49.8,75.234 h1.02
  text "off" at 35.632,74.914 h1.02
  text "CH1" at 38.925,74.914 h1.02
  text "on" at 42.957,74.914 h1.02
  text "Termination" at 49.8,65.186 h1.02
  text "off" at 35.632,64.903 h1.02
  text "CH2" at 38.925,64.903 h1.02
  text "on" at 42.957,64.903 h1.02
  text "EEM1" at 170.109,61.975 h1.14
  text "EEM0" at 186.812,61.975 h1.14
  text "Power +12V" at 203.487,59.725 h1.14
  text "TS3" at -3.566,58.45 h0.8
  text "ADC3" at 3.668,56.1 h0.8
  text "Termination" at 49.8,55.139 h1.02
  text "off" at 35.632,54.893 h1.02
  text "CH3" at 38.925,54.893 h1.02
  text "on" at 42.957,54.893 h1.02
  text "P12V0A" at 111.25,48.926 h0.8 r90
  text "Termination" at 49.8,45.092 h1.02
  text "off" at 35.632,44.882 h1.02
  text "CH4" at 38.925,44.882 h1.02
  text "on" at 42.957,44.882 h1.02
  text "P3V3A" at 149.7,43.065 h1.02 r90
  text "REF" at 111.75,41.975 h0.8
  text "TS5" at -3.566,38.45 h0.8
  text "ADC5" at 3.668,36.1 h0.8
  text "Termination" at 49.8,35.045 h1.02
  text "off" at 35.631,34.872 h1.02
  text "CH5" at 38.925,34.872 h1.02
  text "on" at 42.957,34.872 h1.02
  text "P2V5A" at 119.205,32.18 h0.8
  text "P6V0A" at 127.2,28.034 h0.8 r90
  text "DIOT Sampler / V3.0 / WUT ISE 2024" at 141.175,26.825 h1.02
  text "N12VA" at 110.5,26.126 h0.8 r90
  text "Termination" at 49.8,24.997 h1.02
  text "off" at 35.632,24.861 h1.02
  text "CH6" at 38.925,24.861 h1.02
  text "on" at 42.957,24.861 h1.02
  text "TS7" at -3.566,18.45 h0.8
  text "ADC7" at 3.668,16.1 h0.8
  text "Termination" at 49.8,14.95 h1.02
  text "off" at 35.625,14.85 h1.02
  text "CH7" at 38.925,14.85 h1.02
  text "on" at 42.957,14.85 h1.02
  text "P5V0A" at 117.716,13.614 h0.8 r90
  text "Designed by Pawel Kulik" at 35,3.5 h0.6
BottomOverlay:
  drawing of 263 lines, arcs and shapes, not listed
  text "POWER" at 0.166,81.7 h0.8
  text "TS0" at -1.426,78.6 h0.8
  text "TS2" at -1.426,58.45 h0.8
  text "TS4" at -1.426,38.45 h0.8
  text "TS6" at -1.426,18.45 h0.8
  text "Licensed under CERN-OHL-W v2 or later / https://ohwr.org/cernohl / https://github.com/sinara-hw/EEM_FMC_Carrier" at 163.787,18.399 h1.2
  text "EEM FMC Carrier v1.1" at 156.495,15.725 h1.5
  text "Sampler v3.0" at 125.444,1.88 h2.03
  text "WUT ISE 2024" at 118.45,-0.5 h1.02
TopSolder:
  rectangle: -3.57,-5.55 216.469,-3.15
  region: 202.467,46.205 202.467,42.705 216.43,42.705 216.43,46.205
BottomSolder:
  rectangle: -3.57,-5.55 216.469,-3.15
  rectangle: 98.119,34.355 103.119,40.48
  region: 202.467,46.205 202.467,42.705 216.43,42.705 216.43,46.205
M1 Board Shape:
  lines w0.1: -5.7,3.65 -5.7,82.895 -4.7,83.895 -3.57,85.025 -3.57,94.349 -3.469,94.45 214.469,94.45 216.469,92.45 216.469,-3.55 214.469,-5.55 -3.57,-5.55 -3.57,1.65 -3.57,3.65 -5.7,3.65
M2 Old Board Shape:
  lines w0.1: -5.9,3.65 -5.9,82.695 -3.57,85.025 -3.57,94.349 -3.469,94.45 214.469,94.45 216.469,92.45 216.469,-3.55 214.469,-5.55 -3.57,-5.55 -3.57,1.65 -3.57,3.65 -5.9,3.65
M4 Shielding:
  lines w1: 27.444,-0.12 27.444,89.88 102.444,89.88 102.444,-0.12 27.444,-0.12 ; 113.444,53.88 113.444,88.88 153.444,88.88 153.444,53.88 113.444,53.88
Top 3D Body:
  lines w0.01: -6.352,-6.334 -6.352,75.374
Top Courtyard (Mech15):
  lines w0.1: 169.152,17.126 169.152,60.386 179.392,60.386 179.392,17.126 169.152,17.126 ; 187.922,17.1 198.162,17.1 198.162,60.36 187.922,60.36 187.922,17.1
DrillDrawing:
  rectangle: 111.544,60.38 113.444,61.055

## Text inside footprints (layer, text, board x,y; h text height)
J1: TopOverlay "30" at 195.65,24.85 h1.02 r270; Top Assembly "30" at 195.709,21.585 h1.02 r270
J2: TopOverlay "30" at 176.85,24.925 h1.02 r270; Top Assembly "30" at 176.939,21.611 h1.02 r270
J4: Top Assembly "Board Edge" at -5.874,70.142 h1 r90
J5: Top Assembly "Board Edge" at -5.874,50.142 h1 r90
J6: Top Assembly "Board Edge" at -5.874,30.142 h1 r90
J7: Top Assembly "Board Edge" at -5.874,10.142 h1 r90
J8: DrillDrawing "Diam. 0.5mm +/-0.05" at 215.119,12.95 h1 r180; DrillDrawing "PRESS-FIT TECHNOLOGY" at 215.119,11.45 h1 r180; TopOverlay "6" at 194.419,8.6 h1 r90; TopOverlay "5" at 194.419,6.6 h1 r90; TopOverlay "4" at 194.419,4.6 h1 r90; TopOverlay "3" at 194.419,2.6 h1 r90; TopOverlay "2" at 194.419,0.6 h1 r90; TopOverlay "1" at 194.419,-1.4 h1 r90; Top Assembly "6" at 194.419,8.6 h1 r90; Top Assembly "5" at 194.419,6.6 h1 r90; Top Assembly "4" at 194.419,4.6 h1 r90; Top Assembly "3" at 194.419,2.6 h1 r90; Top Assembly "2" at 194.419,0.6 h1 r90; Top Assembly "1" at 194.419,-1.4 h1 r90; Top Assembly "L" at 199.469,-3.25 h1 r90; Top Assembly "K" at 200.869,-3.25 h1 r90; Top Assembly "J" at 202.269,-3.25 h1 r90; Top Assembly "I" at 203.669,-3 h1 r90; Top Assembly "H" at 205.069,-3.25 h1 r90; Top Assembly "G" at 206.469,-3.25 h1 r90; Top Assembly "F" at 207.869,-3.25 h1 r90; Top Assembly "E" at 209.269,-3.25 h1 r90; Top Assembly "D" at 210.669,-3.25 h1 r90; Top Assembly "C" at 212.069,-4.25 h1 r90; Top Assembly "B" at 213.469,-4.25 h1 r90; Top Assembly "A" at 214.869,-4.25 h1 r90; Mechanical8 "Edge of Daugher Card" at 217.219,0.725 h0.5 r90; Mechanical8 "Top Surface of Mother Board" at 228.719,-0.425 h0.5 r90
J9: DrillDrawing "Diam. 0.5mm +/-0.05" at 215.119,93.95 h1 r180; DrillDrawing "PRESS-FIT TECHNOLOGY" at 215.119,92.45 h1 r180; TopOverlay "7" at 194.419,87.6 h1 r90; TopOverlay "8" at 194.419,89.6 h1 r90; TopOverlay "6" at 194.419,85.6 h1 r90; TopOverlay "5" at 194.419,83.6 h1 r90; TopOverlay "4" at 194.419,81.6 h1 r90; TopOverlay "3" at 194.419,79.6 h1 r90; TopOverlay "2" at 194.419,77.6 h1 r90; TopOverlay "1" at 194.419,75.6 h1 r90; TopOverlay "L" at 199.469,72.75 h1 r90; TopOverlay "K" at 200.869,72.75 h1 r90; TopOverlay "J" at 202.269,72.75 h1 r90; TopOverlay "I" at 203.669,72.75 h1 r90; TopOverlay "H" at 205.069,72.75 h1 r90; TopOverlay "G" at 206.469,72.75 h1 r90; TopOverlay "F" at 207.869,72.75 h1 r90; TopOverlay "E" at 209.269,72.75 h1 r90; TopOverlay "D" at 210.669,72.75 h1 r90; TopOverlay "C" at 212.069,72.75 h1 r90; TopOverlay "B" at 213.469,72.75 h1 r90; TopOverlay "A" at 214.869,72.75 h1 r90; Top Assembly "7" at 194.419,87.6 h1 r90; Top Assembly "8" at 194.419,89.6 h1 r90; Top Assembly "6" at 194.419,85.6 h1 r90; Top Assembly "5" at 194.419,83.6 h1 r90; Top Assembly "4" at 194.419,81.6 h1 r90; Top Assembly "3" at 194.419,79.6 h1 r90; Top Assembly "2" at 194.419,77.6 h1 r90; Top Assembly "1" at 194.419,75.6 h1 r90; Top Assembly "L" at 199.469,73.75 h1 r90; Top Assembly "K" at 200.869,73.75 h1 r90; Top Assembly "J" at 202.269,73.75 h1 r90; Top Assembly "I" at 203.669,74 h1 r90; Top Assembly "H" at 205.069,73.75 h1 r90; Top Assembly "G" at 206.469,73.75 h1 r90; Top Assembly "F" at 207.869,73.75 h1 r90; Top Assembly "E" at 209.269,73.75 h1 r90; Top Assembly "D" at 210.669,73.75 h1 r90; Top Assembly "C" at 212.069,72.75 h1 r90; Top Assembly "B" at 213.469,72.75 h1 r90; Top Assembly "A" at 214.869,72.75 h1 r90; Mechanical8 "Edge of Daugher Card" at 217.219,79.725 h0.5 r90; Mechanical8 "Top Surface of Mother Board" at 228.719,78.575 h0.5 r90
J10: TopOverlay "1" at 201.285,71.142 h1.2 r270; Top Assembly "1" at 201.285,71.142 h1.2 r270
SW1A: TopOverlay "1" at 34.426,82.819 h1; Top Assembly "1" at 34.427,82.824 h1
SW1B: TopOverlay "1" at 34.426,72.819 h1; Top Assembly "1" at 34.427,72.824 h1
SW1C: TopOverlay "1" at 34.439,62.775 h1; Top Assembly "1" at 34.44,62.78 h1
SW1D: TopOverlay "1" at 34.426,52.819 h1; Top Assembly "1" at 34.427,52.824 h1
SW1E: TopOverlay "1" at 34.426,42.819 h1; Top Assembly "1" at 34.427,42.824 h1
SW1F: TopOverlay "1" at 34.426,32.819 h1; Top Assembly "1" at 34.427,32.824 h1
SW1G: TopOverlay "1" at 34.426,22.819 h1; Top Assembly "1" at 34.427,22.824 h1
SW1H: TopOverlay "1" at 34.426,12.819 h1; Top Assembly "1" at 34.427,12.824 h1